# Altium PCB MONA-EDU.PCBDOC
Units mm, origin at the board's own origin, x right, y up, seen from the top; angles counter-clockwise.
Board outline 60.07 x 68.58 mm, 2 copper layers (Top Layer, Bottom Layer); 70 components, 0 nets, 249 pads, 66 vias.
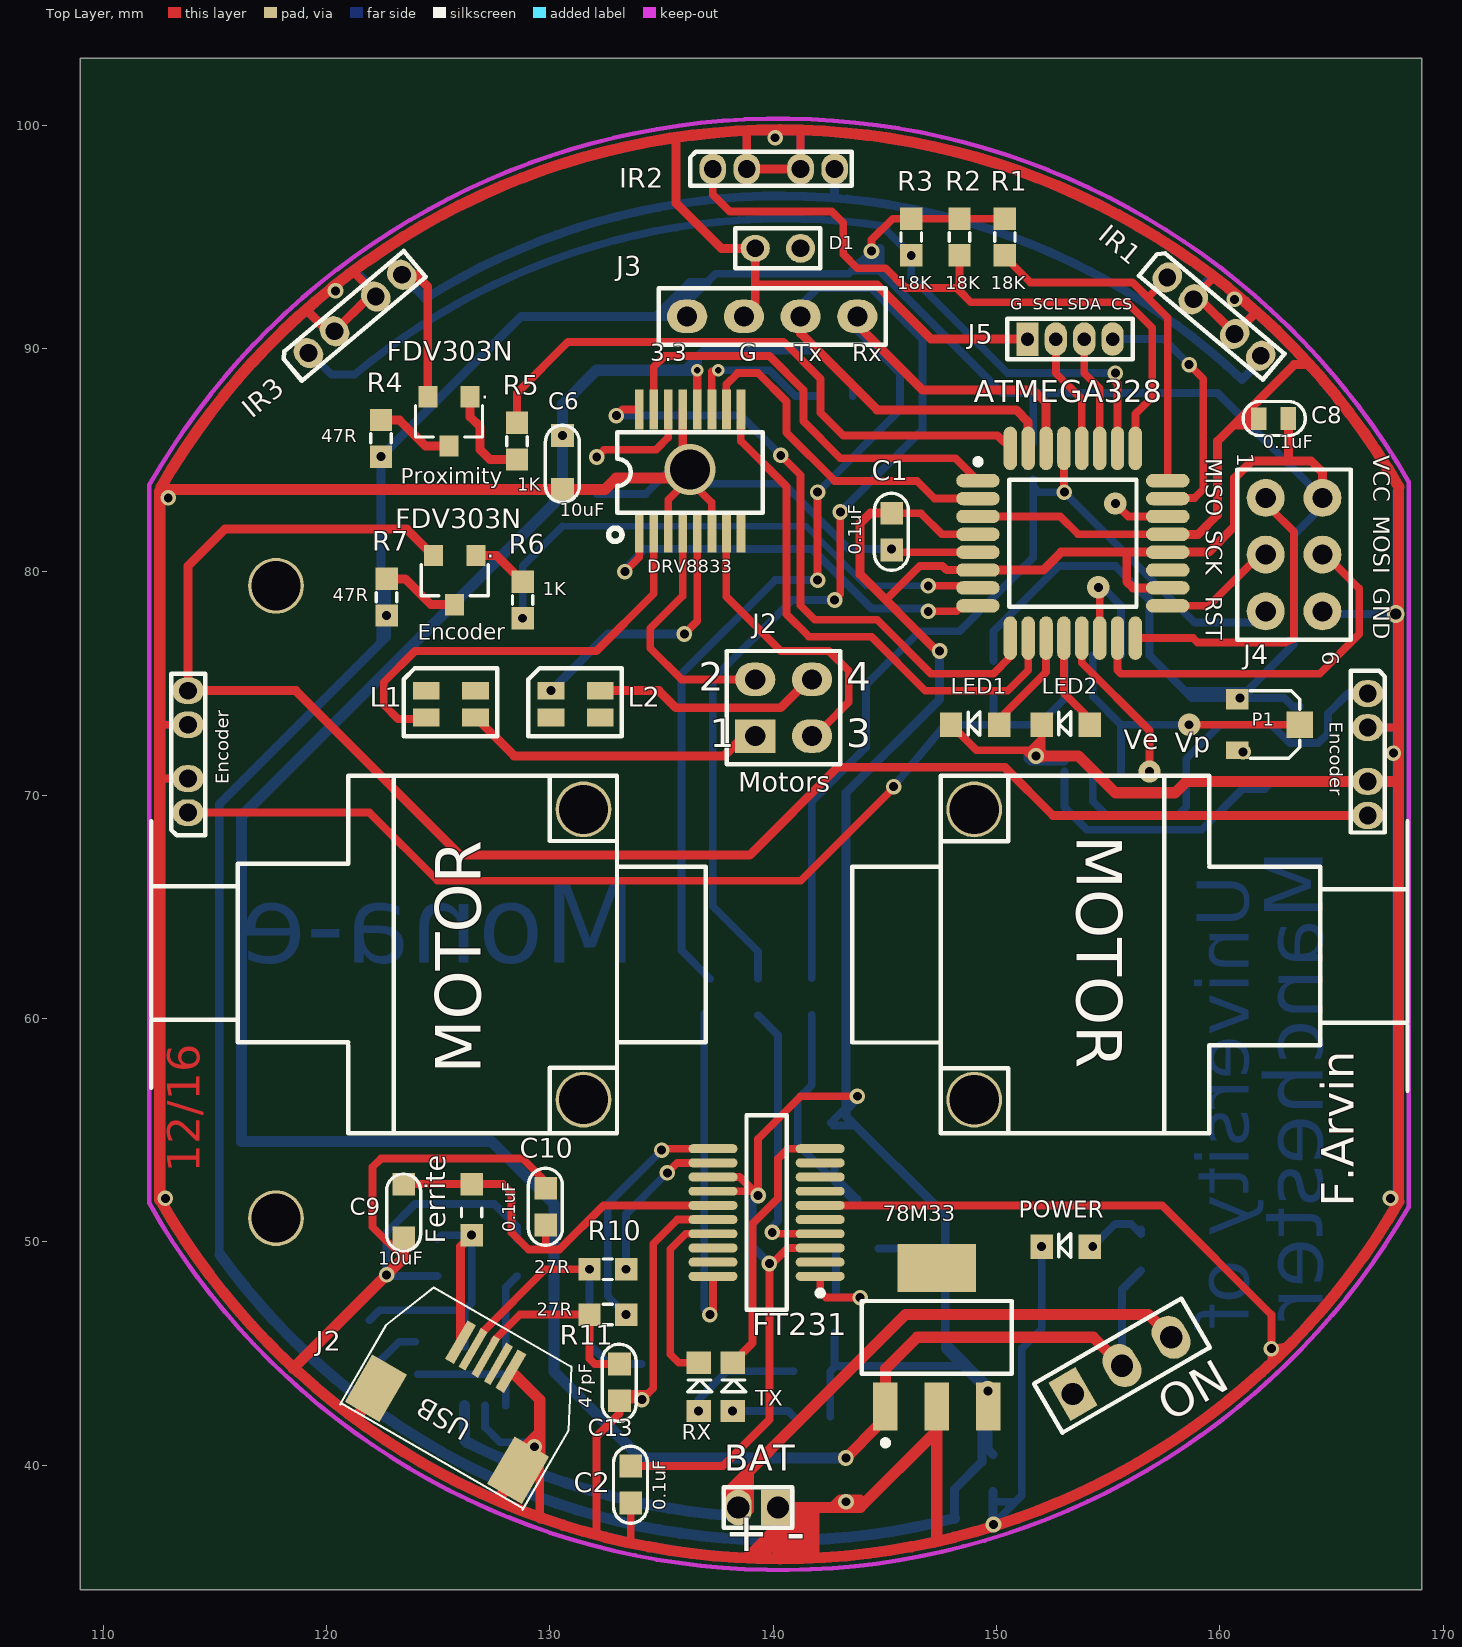
[diagram p0: Top Layer view]
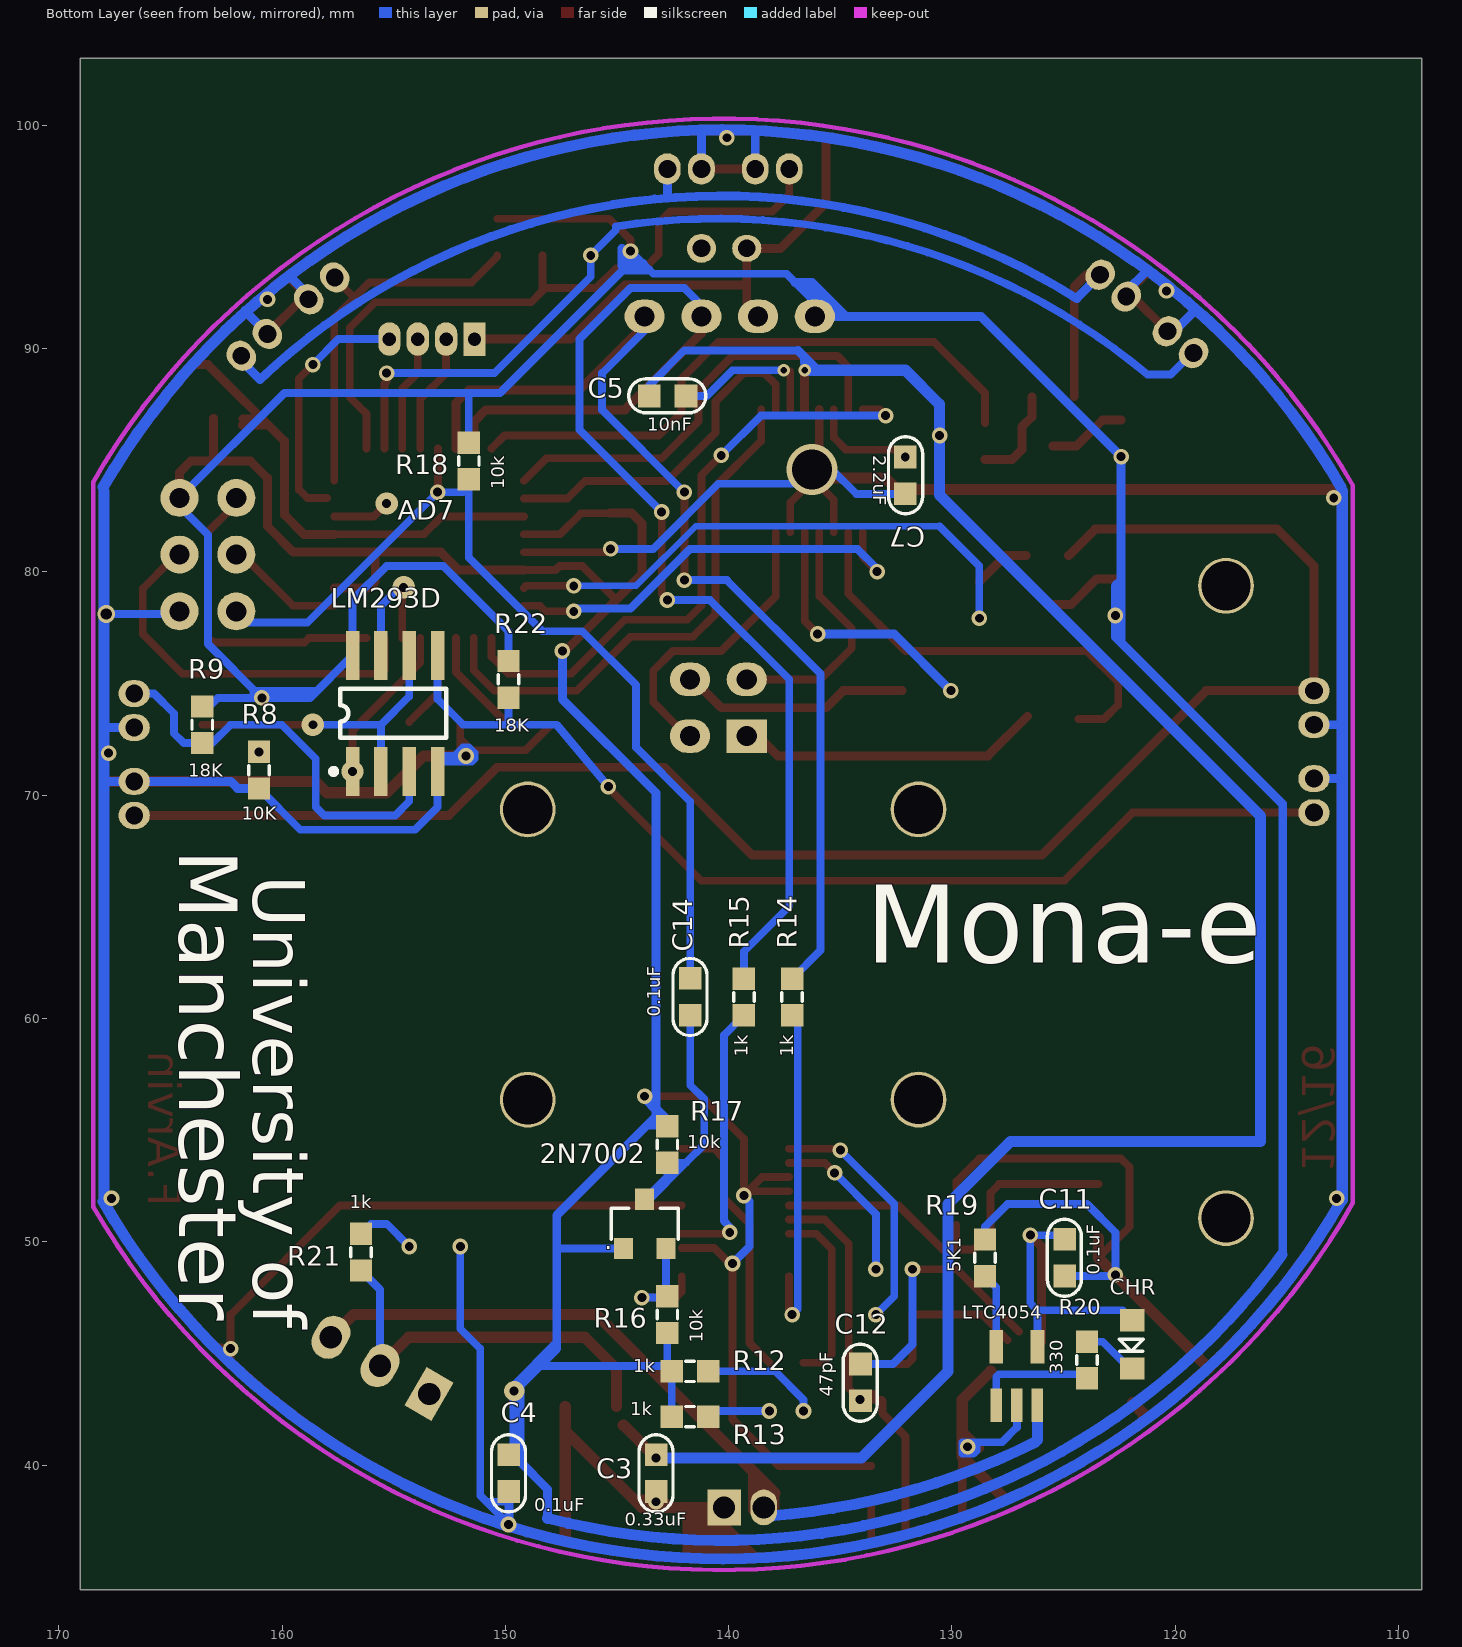
[diagram p1: Bottom Layer view, seen from below]

## Layer stack, top to bottom
Top Layer: signal copper 0.0356
Dielectric: dielectric 0.32, FR-4, Dk 4.8
Bottom Layer: signal copper 0.0356

## Board outline
108.966,102.997 169.037,102.997 169.037,34.417 108.966,34.417 108.966,102.997

## Design rules (kind name [scope] priority, off if disabled: settings)
Clearance [All] p1: gap=0.254
ComponentClearance [All] p1: gap=0.254 collisioncheckmode=3 verticalgap=0.254
PolygonConnect [All] p1: connectstyle=Relief reliefconductorwidth=0.254 reliefentries=4 polygonreliefangle="90 Angle"
RoutingVias [All] p1: holewidth=0.711 width=1.27 viastyle="Through Hole" minholewidth=0.711 minwidth=1.27 maxholewidth=0.711 maxwidth=1.27
SolderMaskExpansion [All] p1: expansion=0.102
TestPointUsage [All] p1: valid=0 allowmultiple=FALSE
Testpoint [All] p1: side=15 testpointundercomponent=TRUE minsize=1.016 maxsize=2.54 preferedsize=1.524 minholesize=0 maxholesize=1.016 preferedholesize=0.813 testpointgrid=0.025 style=1023 order=0123456789
Width [All] p1: maxlimit=0.254 minlimit=0.254 preferedwidth=0.254
18 further rules are at their usual default settings.

## Components (designator, comment, footprint, x,y, rotation, side; value= is the part's Value field where it differs from the comment)
2N7002 "FDV301N" SOT23#1 143.764,50.8 r180 bottom (schematic designator V48)
78M33 "Comment" SOT223 147.32,45.72 r0 top
ATMEGA328 "U1" 32A_M 153.416,81.28 r0 top locked
BAT "+ -" MHDR1X2#1 138.684,38.1 r0 top
C1 "0.1uF" 0603C#1 145.288,81.788 r90 top (schematic designator C14)
C2 "0.1uF" 0603C#1 133.604,39.116 r90 top (schematic designator C14)
C3 "0.33uF" 0603C#1 143.256,39.624 r90 bottom (schematic designator C14)
C4 "0.1uF" 0603C#1 149.86,39.624 r90 bottom (schematic designator C14)
C5 "10nF" 0603C#1 142.748,87.884 r180 bottom (schematic designator C14)
C6 "10uF" 0603C#2 130.556,84.836 r90 top (schematic designator C14)
C7 "2.2uF" 0603C#1 132.08,84.328 r270 bottom (schematic designator C14)
C8 "0.1uF" 0603C#3 162.56,86.868 r0 top (schematic designator C14)
C9 "10uF" 0603C#2 123.444,51.308 r90 top (schematic designator C14)
C10 "0.1uF" 0603C#1 129.794,51.562 r90 top (schematic designator C14)
C11 "0.1uF" 0603C#1 124.968,49.276 r90 bottom (schematic designator C14)
C12 "47pF" 0603C#1 134.112,43.688 r90 bottom (schematic designator C14)
C13 "47pF" 0603C#1 133.096,43.688 r90 top (schematic designator C14)
C14 "0.1uF" 0603C#1 141.732,60.96 r90 bottom
CHR "LED0" 0805L 121.92,46.736 r90 bottom (schematic designator D4)
D1 "Comment" MHDR1X2#2 139.7,94.488 r0 top
DRV8833 "Comment" SSOP16 136.271,84.455 r0 top
Encoder "Comment" "PCBComponent_1 - duplicate" 163.576,67.564 r270 top
Encoder "Comment" "PCBComponent_1 - duplicate" 116.84,76.2 r90 top
FDV303N "FDV301N" SOT23#1 125.73,79.629 r180 top (schematic designator V48)
FDV303N "FDV301N" SOT23#1 125.476,86.741 r180 top (schematic designator V48)
Ferrite "" R0603(1608)#1 126.492,51.308 r90 top (schematic designator R46)
FT231 "Comment" SOP63P600X162-20N 139.7,51.308 r180 top
IR1 "Comment" "PCBComponent_1 - duplicate" 161.036,86.36 r320 top
IR2 "Comment" "PCBComponent_1 - duplicate" 144.272,94.996 r0 top
IR3 "Comment" "PCBComponent_1 - duplicate" 126.492,91.948 r40 top
J2 "Comment" DIP30 123.952,37.592 r60 top locked
J3 "Comment" HDR1X4 136.144,91.44 r0 top
J4 "Comment" HDR2X3 162.052,83.312 r270 top locked
J5 "G  SCL SDA  CS" MHDR1X4 151.384,90.424 r0 top
L1 "Comment" LCC4 124.46,74.676 r0 top
L2 "Comment" LCC4 130.048,74.676 r0 top
LED1 "LED0" 0805L 150.368,73.152 r0 top (schematic designator D4)
LED2 "LED0" 0805L 154.432,73.152 r0 top (schematic designator D4)
LM293D "Comment" SOIC16 152.4,73.66 r180 bottom
LTC4054 "Comment" LT5054 128.016,42.672 r90 bottom
Motors "J2" HDR2X2 139.192,72.644 r0 top locked
ON "Comment" HDR1X3 153.416,43.18 r30 top
P1 "FDV301N" SOT23#2 162.052,73.152 r270 top (schematic designator V48)
POWER "LED0" 0805L 154.432,49.784 r0 top (schematic designator D4)
R1 "18K" R0603(1608)#2 150.368,94.996 r270 top (schematic designator R46)
R2 "18K" R0603(1608)#2 148.336,94.996 r270 top (schematic designator R46)
R3 "18K" R0603(1608)#2 146.177,94.996 r270 top (schematic designator R46)
R4 "47R" R0603(1608)#2 122.428,85.979 r270 top (schematic designator R46)
R5 "1K" R0603(1608)#2 128.524,85.852 r270 top (schematic designator R46)
R6 "1K" R0603(1608)#2 128.778,78.74 r270 top (schematic designator R46)
R7 "47R" R0603(1608)#2 122.682,78.867 r270 top (schematic designator R46)
R8 "10K" R0603(1608)#2 161.036,71.12 r90 bottom (schematic designator R46)
R9 "18K" R0603(1608)#2 163.576,73.152 r270 bottom (schematic designator R46)
R10 "27R" R0603(1608)#2 132.588,48.768 r0 top (schematic designator R46)
R11 "27R" R0603(1608)#2 132.588,46.736 r0 top (schematic designator R46)
R12 "1k" R0603(1608)#2 141.732,44.196 r180 bottom (schematic designator R46)
R13 "1k" R0603(1608)#2 141.732,42.164 r180 bottom (schematic designator R46)
R14 "1k" R0603(1608)#2 137.16,60.96 r90 bottom (schematic designator R46)
R15 "1k" R0603(1608)#2 139.319,60.96 r90 bottom (schematic designator R46)
R16 "10k" R0603(1608)#2 142.748,46.736 r90 bottom (schematic designator R46)
R17 "10k" R0603(1608)#2 142.748,54.356 r90 bottom (schematic designator R46)
R18 "10k" R0603(1608)#2 151.638,84.963 r90 bottom (schematic designator R46)
R19 "5K1" R0603(1608)#2 128.524,49.276 r90 bottom (schematic designator R46)
R20 "330" R0603(1608)#2 123.952,44.704 r90 bottom (schematic designator R46)
R21 "1k" R0603(1608)#2 156.464,49.53 r90 bottom (schematic designator R46)
R22 "18K" R0603(1608)#2 149.86,75.184 r270 bottom (schematic designator R46)
RX "LED0" 0805L 136.652,42.164 r270 top (schematic designator D4)
TX "LED0" 0805L 138.176,42.164 r270 top (schematic designator D4)
? "Comment" "PCBComponent_1 - duplicate1" 157.5,70.86 r180 top locked
? "Comment" "PCBComponent_1 - duplicate1" 123,54.864 r0 top locked

## Footprints (in the part's own frame and the unit in brackets; to place one, negate y for a bottom-side part, rotate by r counter-clockwise, add the part's x,y. Pads: shape width x height; smd on the part's side, far side on the other; paste and mask are expansions set on the pad)
32A_M [mm] "Thin QFP, 32-Leads, Body 7x7mm, Pitch 0.8mm, IPC Low Density"
  oval 1.95x0.6 smd: 1(-4.25,2.8) 2(-4.25,2) 3(-4.25,1.2) 4(-4.25,0.4) 5(-4.25,-0.4) 6(-4.25,-1.2) 7(-4.25,-2) 8(-4.25,-2.8) 17(4.25,-2.8) 18(4.25,-2) 19(4.25,-1.2) 20(4.25,-0.4) 21(4.25,0.4) 22(4.25,1.2) 23(4.25,2) 24(4.25,2.8)
  oval 0.6x1.95 smd: 9(-2.8,-4.25) 10(-2,-4.25) 11(-1.2,-4.25) 12(-0.4,-4.25) 13(0.4,-4.25) 14(1.2,-4.25) 15(2,-4.25) 16(2.8,-4.25) 25(2.8,4.25) 26(2,4.25) 27(1.2,4.25) 28(0.4,4.25) 29(-0.4,4.25) 30(-1.2,4.25) 31(-2,4.25) 32(-2.8,4.25)
  silkscreen extent -4.37,-2.85 2.85,3.77, body extent -3.5,-3.5 3.5,3.5, height 1.2
0603C#1 [mil]
  rect 40x40 smd: 1(-32,-0.5) 2(33,-0.5)
  silkscreen extent -68,-30 68,30
0603C#2 [mil]
  rect 40x40 smd: 1(-45,0) 2(50,0)
  silkscreen extent -68,-30 68,30
0603C#3 [mil]
  rect 27.56x40 smd: 1(-32,-0.5) 2(20,0)
  silkscreen extent -60,-30 50,30
0805L [mm]
  rect 1x1.1 smd: 1(-0.254,0) 2(-2.413,0)
  silkscreen extent -1.64,-0.48 -1.11,0.58
DIP30 [mm]
  rect 2.45x1.8 smd: 0(4.191,4.445) 0(4.191,-2.921)
  rect 2x0.35 smd: " "(7.874,0.235) " "(7.874,0.885) ""(7.874,1.535)
  rect 2x0.45 smd: GND(7.874,-0.415) VDD(7.874,2.185)
  silkscreen extent 2.76,-3.97 9.4,5.46
HDR1X3 [mm] "Connector; Header; 3 Position"
  rect 1.4x2 hole 1: 1(0,0)
  oval 1.5x2 hole 1: 2(2.54,0) 3(5.08,0)
  silkscreen extent -1.27,-1.27 6.35,1.27
HDR1X4 [mm] "Connector; Header; 4 Position"
  oval 1.8x1.5 hole 0.9: 1(0,0) 2(2.54,0) 3(5.08,0) 4(7.62,0)
  silkscreen extent -1.27,-1.27 8.89,1.27
HDR2X2 [mm] "Connector; Header; 2x2 Position"
  rect 1.8x1.5 hole 0.9: 1(0,0)
  oval 1.8x1.5 hole 0.9: 2(0,2.54) 3(2.54,0) 4(2.54,2.54)
  silkscreen extent -1.27,-1.27 3.81,3.81
HDR2X3 [mm] "Connector; Header; 3x2 Position"
  round 1.7 hole 0.9: 1(0,0) 2(0,2.54) 3(2.54,0) 4(2.54,2.54) 5(5.08,0) 6(5.08,2.54)
  silkscreen extent -1.27,-1.27 6.35,3.81
LCC4 [mm]
  rect 1.2x0.8 smd: 1(0,-1.2) 2(2.2,-1.2) 3(2.2,0) 4(0,0)
  silkscreen extent -1.02,-2.03 3.17,1.02
LT5054 [mm]
  rect 1.5x0.518 smd: BAT(0,-1.84) GND(0,-0.92) LED(0,0)
  rect 1.5x0.62 smd: PROG(2.62,0) VCC(2.62,-1.84)
MHDR1X2#1 [mm] "Connector; Header; 2 Position"
  oval 1.2x1.6 hole 1: 1(-0.254,0)
  rect 1.5x1.6 hole 1: 2(1.524,0)
  silkscreen extent -0.9,-0.9 2.17,0.9
MHDR1X2#2 [mm] "Connector; Header; 2 Position"
  oval 1.3x1.2 hole 0.8: 1(-0.508,0)
  round 1.3 hole 0.8: 2(1.524,0)
  silkscreen extent -1.4,-0.9 2.41,0.9
MHDR1X4 [mm] "Connector; Header; 4 Position"
  rect 1x1.5 hole 0.6: 1(0,0)
  oval 1x1.5 hole 0.6: 2(1.27,0) 3(2.54,0) 4(3.81,0)
  silkscreen extent -0.9,-0.9 4.71,0.9
"PCBComponent_1 - duplicate" [mm]
  oval 1.2x1.4 hole 0.8: D-A(-1.524,3.048) D-C(-3.048,3.048) T-C(-6.985,3.048) T-E(-5.461,3.048)
  silkscreen extent -8,2.29 -0.76,3.81
"PCBComponent_1 - duplicate1" [mm]
  round 2.5 hole 2.2: 0(8.5,14.5) 1(8.5,1.5)
  silkscreen extent -10.9,0 13.97,16
R0603(1608)#1 [mm] "Chip Resistor, Body 1.6x0.8mm, IPC Medium Density"
  rect 1x1 smd: 1(-1.016,0) 2(1.27,0)
  silkscreen extent -0.2,-0.46 0.2,0.46, body extent -0.85,-0.48 0.85,0.48, height 0.6
R0603(1608)#2 [mm] "Chip Resistor, Body 1.6x0.8mm, IPC Medium Density"
  rect 1x1 smd: 1(-0.82,0) 2(0.82,0)
  silkscreen extent -0.2,-0.46 0.2,0.46, body extent -0.85,-0.48 0.85,0.48, height 0.6
SOIC16 [mm] "Small Outline; 16 Leads; Body Width 3.9 mm; Pitch 1.27 mm"
  rect 0.6x2.2 smd: "1 OUT A"(-4.445,-2.6) "2 IN-A"(-3.175,-2.6) "3 IN+A"(-1.905,-2.6) "4 GND"(-0.635,-2.6) "5 IN+B"(-0.635,2.6) "6 IN-B"(-1.905,2.6) "7 OUT B"(-3.175,2.6) "8 VCC"(-4.445,2.6)
  silkscreen extent -5.42,-2.72 -0.25,1.1
SOP63P600X162-20N [mm] "SOP, 20-Leads, Body 8.7x3.9mm (max), Pitch 0.63mm, IPC Medium Density"
  oval 2.2x0.4 smd: 1(-2.4,2.857) 2(-2.4,2.222) 3(-2.4,1.587) 4(-2.4,0.952) 5(-2.4,0.317) 6(-2.4,-0.318) 7(-2.4,-0.953) 8(-2.4,-1.588) 9(-2.4,-2.223) 10(-2.4,-2.858) 11(2.4,-2.857) 12(2.4,-2.222) 13(2.4,-1.587) 14(2.4,-0.952) 15(2.4,-0.317) 16(2.4,0.318) 17(2.4,0.953) 18(2.4,1.588) 19(2.4,2.223) 20(2.4,2.858)
  silkscreen extent -2.53,-4.35 0.9,4.35, body extent -1.95,-4.33 1.95,4.33, height 1.62
SOT23#1 [mm] "SOT23, 3-Leads, Body 2.9x1.3mm, Pitch 0.95mm, Lead Span 2.5mm, IPC Medium Density"
  rect 0.85x0.95 smd: Drain(0,1.1) Gate(-0.95,-1.1) S(0.95,-1.1)
  silkscreen extent -1.5,-0.7 1.5,0.7, body extent -1.5,-0.7 1.5,0.7, height 1.1
SOT23#2 [mm] "SOT23, 3-Leads, Body 2.9x1.3mm, Pitch 0.95mm, Lead Span 2.5mm, IPC Medium Density"
  rect 0.9x1 smd: 1(-1.143,-1.27)
  rect 0.8x1 smd: 2(1.143,-1.27)
  rect 1.2x1.2 smd: 3(0,1.524)
  silkscreen extent -1.52,-0.7 1.5,1.52
SOT223 [mm] "SOT-223/SC-73; 4 Leads; Body 6.7 x 7.3 mm, inc. leads (LxW max)"
  rect 1.1x2.15 smd: 1(-2.3,-3.1) 2(0,-3.1) 3(2.3,-3.1)
  rect 3.5x2.15 smd: 4(0,3.1)
  silkscreen extent -3.35,-4.85 3.35,1.63
SSOP16 [mm] "SSOP; 16 Leads; Body Width 5.3 mm; Pitch 0.65 mm"
  rect 0.4x1.8 smd: 1(-2.275,-2.68) 2(-1.625,-2.68) 3(-0.975,-2.68) 4(-0.325,-2.68) 5(0.325,-2.68) 6(0.975,-2.68) 7(1.625,-2.68) 8(2.275,-2.68) 9(2.275,2.82) 10(1.625,2.82) 11(0.975,2.82) 12(0.325,2.82) 13(-0.325,2.82) 14(-0.975,2.82) 15(-1.625,2.82) 16(-2.275,2.82)
  silkscreen extent -3.65,-3.09 3.25,1.8

## Part data
2N7002 FDV303N FDV303N P1: "N-Channel MOSFET, 0.22A, 25V Vgs=2.7V Rds(on)=5"
C1 C2 C3 C4 C5 C6 C7 C8 C9 C10 C11 C12 C13 C14: library part CAP, "Capacitor"
CHR LED1 LED2 POWER RX TX: "Typical INFRARED GaAs LED"
Ferrite R1 R2 R3 R4 R5 R6 R7 R8 R9 R10 R11 R12 R13 R14 R15 R16 R17 R18 R19 R20 R21 R22: library part "R47 0603 5%", "Resistencia SMT Generica"

## Free pads (board coordinates)
  round 2.5 hole 2.2: 0(117.729,51.054) 0(117.729,79.375)

## Via types
v1: diameter 0.7, hole 0.4, Top Layer to Bottom Layer, 57 vias
v2: diameter 1, hole 0.4, Top Layer to Bottom Layer, 4 vias
v3: diameter 0.55, hole 0.3, Top Layer to Bottom Layer, 2 vias
v4: diameter 0.8, hole 0.5, Top Layer to Bottom Layer, 1 vias
v5: diameter 0.9, hole 0.4, Top Layer to Bottom Layer, 1 vias
v6: diameter 2.3, hole 1.8, Top Layer to Bottom Layer, 1 vias

## Nets (pads, with @x,y where several pads share a name; then routed paths per layer and width w, separated by ;. In a path a pad name is that pad's centre, name@x,y a point inside that pad or via, vN(x,y) a via of type N, cw(c..) or ccw(c..) an arc to the next point about the centre after c; other vN are vias at no path point)
pads on no net: 2N7002.Drain 2N7002.Gate 2N7002.S 78M33.1 78M33.2 78M33.3 78M33.4 "J2. " "LM293D.1 OUT A" "LM293D.2 IN-A" "LM293D.3 IN+A" "LM293D.4 GND" "LM293D.5 IN+B" "LM293D.6 IN-B" "LM293D.7 OUT B" "LM293D.8 VCC" ?.0 ?.1 ATMEGA328.1 ATMEGA328.2 ATMEGA328.3 ATMEGA328.4 ATMEGA328.5 ATMEGA328.6 ATMEGA328.7 ATMEGA328.8 ATMEGA328.9 ATMEGA328.10 ATMEGA328.11 ATMEGA328.12 ATMEGA328.13 ATMEGA328.14 ATMEGA328.15 ATMEGA328.16 ATMEGA328.17 ATMEGA328.18 ATMEGA328.19 ATMEGA328.20 ATMEGA328.21 ATMEGA328.22 ATMEGA328.23 ATMEGA328.24 ATMEGA328.25 ATMEGA328.26 ATMEGA328.27 ATMEGA328.28 ATMEGA328.29 ATMEGA328.30 ATMEGA328.31 ATMEGA328.32 BAT.1 BAT.2 C1.1 C1.2 C2.1 C2.2 C3.1 C3.2 C4.1 C4.2 C5.1 C5.2 C6.1 C6.2 C7.1 C7.2 C8.1 C8.2 C9.1 C9.2 C10.1 C10.2 C11.1 C11.2 C12.1 C12.2 C13.1 C13.2 C14.1 C14.2 CHR.1 CHR.2 D1.1 D1.2 DRV8833.1 DRV8833.2 DRV8833.3 DRV8833.4 DRV8833.5 DRV8833.6 DRV8833.7 DRV8833.8 DRV8833.9 DRV8833.10 DRV8833.11 DRV8833.12 DRV8833.13 DRV8833.14 DRV8833.15 DRV8833.16 Encoder.D-A Encoder.D-C Encoder.T-C Encoder.T-E FDV303N.Drain FDV303N.Gate FDV303N.S Ferrite.1 Ferrite.2 FT231.1 FT231.2 FT231.3 FT231.4 FT231.5 FT231.6 FT231.7 FT231.8 FT231.9 FT231.10 FT231.11 FT231.12 FT231.13 FT231.14 FT231.15 FT231.16 FT231.17 FT231.18 FT231.19 FT231.20 IR1.D-A IR1.D-C IR1.T-C IR1.T-E IR2.D-A IR2.D-C IR2.T-C IR2.T-E IR3.D-A IR3.D-C IR3.T-C IR3.T-E J2. J2.0 J2.GND J2.VDD J3.1 J3.2 J3.3 J3.4 J4.1 J4.2 J4.3 J4.4 J4.5 J4.6 J5.1 J5.2 J5.3 J5.4 L1.1 L1.2 L1.3 L1.4 L2.1 L2.2 L2.3 L2.4 LED1.1 LED1.2 LED2.1 LED2.2 LTC4054.BAT LTC4054.GND LTC4054.LED LTC4054.PROG LTC4054.VCC Motors.1 Motors.2 Motors.3 Motors.4 ON.1 ON.2 ON.3 P1.1 P1.2 P1.3 POWER.1 POWER.2 R1.1 R1.2 R2.1 R2.2 R3.1 R3.2 R4.1 R4.2 R5.1 R5.2 R6.1 R6.2 R7.1 R7.2 R8.1 R8.2 R9.1 R9.2 R10.1 R10.2 R11.1 R11.2 R12.1 R12.2 R13.1 R13.2 R14.1 R14.2 R15.1 R15.2 R16.1 R16.2 R17.1 R17.2 R18.1 R18.2 R19.1 R19.2 R20.1 R20.2 R21.1 R21.2 R22.1 R22.2 RX.1 RX.2 TX.1 TX.2
copper on no net: | length 2169.4
  Top Layer w0.35: 112.522,70.739 113.792,70.739 ; 112.522,73.152 113.792,73.152 ; 113.792,69.215 121.92,69.215 124.968,66.167 141.224,66.167 v1@145.415,70.358 ; 121.158,93.472 122.198,92.432 122.198,92.324 ; 123.444,49.276 122.047,50.673 122.047,53.34 122.428,53.721 128.778,53.721 129.807,52.692 129.807,52.4 ; 123.444,52.578 126.492,52.578 127.889,52.578 128.27,52.197 128.27,50.419 129.032,49.657 130.429,49.657 132.398,51.625 137.3,51.625 ; 124.333,73.406 123.19,73.406 122.555,74.041 122.555,75.057 123.952,76.454 132.08,76.454 134.646,79.02 134.646,81.775 ; 127,45.974 129.794,48.768 v1(131.768,48.768) ; 127.508,45.593 128.651,46.736 131.768,46.736 131.768,44.762 132.004,44.526 133.109,44.526 ; 128.524,86.672 128.524,88.011 130.81,90.297 140.462,90.297 142.113,88.646 142.113,87.122 143.129,86.106 150.04,86.106 150.616,85.53 ; 129.807,49.657 129.807,50.749 ; 132.08,36.957 132.08,41.275 133.109,42.304 133.109,42.875 133.159,42.926 v1(134.112,42.926) 134.62,43.434 134.62,49.911 135.7,50.99 137.3,50.99 ; v1(132.093,85.141) 132.423,85.471 134.747,85.471 135.296,86.02 135.296,87.275 ; v1(132.969,86.995) 133.249,87.275 133.996,87.275 ; v1(133.35,80.01) 133.996,80.656 133.996,81.775 ; 133.477,43.18 134.366,43.18 ; 133.617,36.462 133.617,38.303 ; 133.617,39.954 135.077,39.954 137.744,39.954 139.827,42.037 139.827,48.895 140.653,49.721 142.1,49.721 ; 134.646,87.275 134.646,89.18 135.128,89.662 139.827,89.662 141.351,88.138 141.351,86.741 143.002,85.09 148.156,85.09 149.166,84.08 ; v1@135.064,54.165 137.3,54.165 ; v1(135.255,53.086) 135.7,53.53 137.3,53.53 ; 135.296,81.775 135.296,83.226 v6@136.017,83.947 ; 135.946,81.775 135.946,78.923 134.493,77.47 134.493,77.343 134.493,76.581 135.89,75.184 138.684,75.184 139.192,75.692 ; v1(136.017,77.216) 136.596,77.795 136.596,81.775 ; v6@136.398,83.947 137.246,83.099 137.246,81.775 ; 136.652,44.577 135.763,44.577 135.382,44.958 135.382,49.657 136.081,50.355 137.3,50.355 ; v1(137.16,46.736) 137.3,46.876 137.3,48.45 ; 137.246,87.275 137.246,88.986 v3(137.541,89.027) ; 137.287,98.044 137.287,96.901 138.049,96.139 142.621,96.139 143.129,95.631 143.129,94.234 143.764,93.599 145.034,93.599 145.923,92.71 148.336,92.71 ; 137.3,52.895 138.493,52.895 v1(139.319,52.07) ; 137.896,81.775 137.896,78.893 140.335,76.454 142.494,76.454 143.383,75.565 143.383,74.168 142.367,73.152 141.732,73.152 ; 137.896,87.275 137.896,88.392 138.404,88.9 139.319,88.9 140.589,87.63 140.589,86.233 142.748,84.074 146.431,84.074 147.225,83.28 149.166,83.28 ; 138.176,44.577 139.065,45.466 139.065,50.8 140.208,51.943 140.208,53.721 140.653,54.165 142.1,54.165 ; 138.367,52.261 137.3,52.261 139.129,52.261 v1(139.319,52.07) ; 138.546,87.275 138.546,85.863 140.589,83.82 140.589,78.105 141.605,77.089 144.399,77.089 146.812,74.676 150.495,74.676 151.416,75.597 151.416,77.03 ; 139.573,35.941 139.954,36.322 139.954,36.703 139.192,35.941 138.811,35.941 140.208,37.338 140.208,38.1 ; v1(139.954,50.419) 140.017,50.355 142.1,50.355 ; 140.208,36.449 140.716,35.941 141.097,35.941 140.462,36.576 140.462,36.957 141.478,35.941 141.859,35.941 140.462,37.338 140.462,37.592 ; v1(140.335,85.217) 141.224,84.328 141.224,78.486 141.859,77.851 144.653,77.851 147.066,75.438 149.86,75.438 150.616,76.194 150.616,77.03 ; 141.224,98.044 141.224,99.822 ; v1(141.986,79.629) v1(141.986,83.566) ; 142.1,48.45 142.1,47.765 142.367,47.498 v1(143.891,47.498) ; 142.1,51.625 157.416,51.625 162.306,46.736 162.306,44.577 ; v1(142.748,78.74) 143.002,78.994 v1(143.002,82.677) ; v1(143.764,56.515) 141.224,56.515 139.319,54.61 v1(139.319,52.07) ; v1(144.399,94.361) 144.399,94.869 145.346,95.816 146.177,95.816 148.336,95.816 150.368,95.816 ; 145.034,78.74 146.558,80.264 147.574,80.264 147.758,80.08 149.166,80.08 ; 145.301,82.626 146.609,82.626 147.555,81.68 149.166,81.68 ; v1@145.396,80.88 149.166,80.88 ; 145.923,87.249 146.05,87.249 ; v1(146.939,78.232) 148.209,78.232 148.457,78.48 149.166,78.48 ; v1(146.939,79.375) 149.071,79.375 149.166,79.28 ; 147.955,73.152 149.098,72.009 151.511,72.009 152.019,72.517 ; 148.336,94.176 148.336,92.583 148.844,92.075 154.305,92.075 154.432,92.075 155.829,92.075 156.972,90.932 156.972,90.155 156.972,87.825 156.591,87.444 156.216,87.07 156.216,85.53 ; 149.166,82.48 152.851,82.48 153.651,81.68 157.666,81.68 ; 150.114,73.406 152.216,75.508 152.216,77.03 ; 150.368,94.176 150.368,94.107 151.511,92.964 156.083,92.964 157.666,91.381 157.666,84.08 ; 151.257,72.009 151.638,71.628 152.019,71.628 152.019,72.517 ; 152.019,73.152 152.019,72.517 ; 152.654,90.424 152.654,88.9 153.816,87.738 153.816,85.53 ; 153.016,77.03 153.016,74.568 154.305,73.279 ; v1@153.016,83.585 153.016,85.53 ; 153.816,77.03 153.816,75.927 156.845,72.898 v2(156.845,71.06) ; 153.924,90.424 153.924,88.9 154.616,88.208 154.616,85.53 ; v2(154.559,79.306) 154.616,79.249 154.616,77.03 ; v2(155.321,83.058) 155.899,82.48 157.666,82.48 ; v1(155.321,88.9) 155.321,88.519 155.416,88.424 155.416,85.53 ; 155.416,77.03 155.416,75.597 155.575,75.438 164.465,75.438 166.243,77.216 166.243,79.248 164.973,80.518 164.592,80.518 ; 156.216,77.03 158.809,77.03 159.004,76.835 162.941,76.835 163.322,76.993 163.322,81.788 162.306,82.804 162.306,83.312 ; 156.771,92.276 157.644,93.149 157.644,93.185 ; 157.666,78.48 159.506,78.48 161.417,80.391 ; 157.988,83.312 158.877,83.312 159.258,83.693 159.258,88.646 v1(158.623,89.281) ; v2(158.623,73.152) 163.576,73.152 ; 158.812,92.205 158.812,92.264 159.766,93.218 ; v1(162.306,45.212) 163.068,45.339 ; 166.624,70.612 168,70.612 ; 166.624,73.025 168,73.025
  Top Layer w0.4: 119.126,91.694 120.047,90.773 120.349,90.773 121.9,92.324 122.198,92.324 ; 122.428,86.799 123.259,86.799 124.417,85.641 125.476,85.641 ; 122.682,79.687 123.513,79.687 124.671,78.529 125.73,78.529 ; 123.365,93.303 123.994,93.303 124.526,92.771 124.526,89.662 ; 124.526,87.841 124.526,89.85 ; 124.78,80.729 123.594,81.915 115.443,81.915 113.792,80.264 113.792,74.676 118.618,74.676 125.984,67.31 138.938,67.31 142.875,71.247 150.368,71.247 152.527,69.088 164.465,69.088 166.624,69.088 ; 125.997,45.504 125.997,49.797 v1(126.492,50.292) ; 126.426,87.841 126.426,86.934 126.873,86.487 126.873,85.471 127.312,85.032 128.524,85.032 ; 126.619,73.533 128.397,71.755 137.795,71.755 139.192,73.152 ; 126.68,80.729 127.609,80.729 128.778,79.56 ; 128.778,40.767 129.54,41.529 ; 129.54,37.592 129.54,40.386 ; 132.248,74.676 134.874,74.676 135.636,73.914 140.335,73.914 141.732,75.311 141.732,75.692 ; 135.636,99.441 135.636,96.52 137.668,94.488 139.192,94.488 139.192,91.948 138.684,91.44 ; v6@135.946,85.273 135.946,87.275 ; 136.596,87.275 v3(136.596,89.027) ; 137.922,38.1 137.922,38.735 ; 138.736,38.025 138.736,39.549 ; 138.811,99.695 138.811,98.044 141.224,98.044 ; 138.938,37.973 138.938,39.751 ; 139.192,92.837 144.653,92.837 147.066,90.424 151.384,90.424 ; 140.843,38.1 140.843,36.576 140.882,36.537 140.882,36.029 141.224,36.371 141.224,38.1 141.605,38.1 141.607,38.098 141.607,36.193 141.859,35.941 141.859,37.973 141.986,38.1 ; 141.224,91.44 141.224,90.678 144.653,87.249 150.876,87.249 151.416,86.709 151.416,85.53 ; 142.621,38.1 143.002,38.481 143.891,38.481 ; v1@143.226,40.289 v1(143.249,40.313) ; 143.764,91.44 143.764,91.059 146.685,88.138 151.638,88.138 152.216,87.56 152.216,85.53 ; 145.301,82.626 144.348,82.626 143.891,82.169 143.891,79.883 147.32,76.454 v1(147.447,76.454) ; 149.166,80.08 152.089,80.08 152.889,80.88 157.666,80.88 159.493,80.88 160.655,82.042 160.655,84.201 161.417,84.963 164.084,84.963 164.592,84.455 164.592,83.312 ; 149.62,42.62 149.733,42.733 ; 155.829,80.88 155.829,79.566 156.115,79.28 157.666,79.28 ; 157.666,81.68 159.023,81.68 159.893,82.55 159.893,85.852 163.322,89.281 164.084,89.281 ; 158.812,92.205 159.109,92.205 160.66,90.654 161.544,91.538 ; 161.747,86.855 160.965,86.855 160.693,86.583 161.767,86.583 ; 163.068,84.963 163.068,86.868
  Top Layer w0.5: v1@112.522,51.87 112.522,83.611 112.604,83.693 130.81,83.693 ; v1@112.585,51.796 ccw(c140.297,67.796) 168.01,51.796 ; 112.585,83.796 cw(c140.297,67.796) 168.01,83.796 ; 118.491,44.323 123.444,49.276 123.444,50.165 ; 121.412,42.037 121.412,42.291 121.92,42.799 ; 127.762,38.608 129.54,40.386 129.54,42.926 128.262,44.204 128.248,44.204 ; 130.556,83.693 132.461,83.693 132.969,84.201 v6@135.636,84.201 ; 137.922,38.735 138.684,39.497 ; 138.43,38.1 138.43,39.243 141.224,42.037 145.923,46.736 151.638,46.736 156.799,46.736 157.815,45.72 ; 140.208,35.814 140.208,38.1 143.891,38.1 147.32,41.529 147.32,42.62 147.32,36.576 ; v1(143.249,40.313) 144.72,41.783 ; 145.02,42.62 145.02,44.309 146.431,45.72 154.346,45.72 155.616,44.45 ; v1(151.765,71.755) 153.67,71.755 155.321,70.104 157.988,70.104 158.496,70.612 168,70.612 ; 168,51.87 168,83.611
  Bottom Layer w0.3: 130.556,82.042 141.478,82.042 144.145,79.375 v1(146.939,79.375)
  Bottom Layer w0.35: 119.182,89.793 119.249,89.793 120.204,88.838 121.251,88.838 ; 121.251,88.838 cw(c140.487,65.817) 145.058,95.466 145.058,95.295 v1(146.177,94.176) 146.177,93.218 150.495,88.9 v1(155.321,88.9) ; 121.92,44.323 122.047,44.323 123.248,45.524 123.952,45.524 ; 121.92,46.482 122.366,46.928 126.176,46.928 ; v1@122.682,48.463 124.955,48.463 ; v1(122.682,48.514) 122.682,50.419 123.952,51.689 127.508,51.689 128.524,50.673 128.524,50.096 ; 124.079,44.069 127.889,44.069 128.016,43.942 128.016,42.672 ; 124.955,50.114 125.133,50.292 v1(126.492,50.292) 126.492,47.244 126.176,46.928 ; 126.176,41.118 126.276,41.018 ; 126.176,45.292 126.176,46.928 ; 127.096,42.672 127.096,41.687 127.762,41.021 129.095,41.021 v1(129.299,40.818) ; 128.016,45.292 128.016,47.948 128.524,48.456 ; v1(128.778,77.92) 128.778,80.264 130.556,82.042 ; v1(131.768,48.768) 131.768,45.397 132.639,44.526 134.099,44.526 ; 132.093,83.49 134.29,83.49 135.382,84.582 v6(136.271,84.582) ; v1(132.969,86.995) 138.557,86.995 v1(140.335,85.217) ; v1@133.35,80.137 134.239,81.026 141.732,81.026 144.399,78.359 146.812,78.359 v1(146.939,78.232) ; v1(133.408,46.736) 132.588,47.556 132.588,51.689 v1(135.001,54.102) ; v1(133.408,48.768) 133.408,51.239 v1(135.255,53.086) ; 136.144,91.44 136.144,92.075 137.033,92.964 137.414,93.345 143.383,93.345 v1(144.399,94.361) 144.399,93.853 145.542,92.71 150.241,88.011 159.893,88.011 164.592,83.312 164.592,82.931 163.322,81.661 163.322,76.766 v1(160.909,74.353) ; v6@136.271,83.947 140.462,83.947 143.383,81.026 v1(145.288,81.026) ; v3(136.596,89.027) 136.652,89.662 136.906,89.916 141.986,89.916 143.561,88.341 143.561,87.871 ; v1(136.652,42.418) 136.652,42.926 137.922,44.196 140.912,44.196 ; 136.906,60.198 136.906,46.99 v1(137.16,46.736) ; 137.16,61.78 135.89,63.05 135.89,75.438 140.081,79.629 v1(141.986,79.629) ; v3(137.541,89.027) 139.827,89.027 140.983,87.871 141.91,87.871 ; v1(138.176,42.418) 140.658,42.418 140.912,42.164 ; v1(139.319,52.07) 139.065,51.816 139.065,49.784 v1(139.827,49.022) ; 139.319,60.14 140.208,59.251 140.208,50.927 139.954,50.673 v1(139.954,50.419) ; 139.319,61.78 139.319,62.992 137.287,65.024 137.287,75.184 140.843,78.74 v1(142.748,78.74) ; 141.719,60.147 141.719,57.01 141.097,56.388 141.097,54.356 141.917,53.536 ; 141.719,61.798 141.719,69.71 144.145,72.136 144.145,74.93 146.558,77.343 148.336,77.343 151.638,80.645 151.638,84.143 ; 141.732,91.44 141.224,91.44 141.224,91.948 141.986,92.71 144.399,92.71 146.685,90.424 146.685,86.36 v1(143.002,82.677) ; v1(141.986,83.566) 145.669,87.249 145.669,88.9 143.764,90.805 143.764,91.44 ; 142.552,42.164 142.552,44.196 ; 142.574,55.325 142.687,55.212 ; 142.748,45.916 142.748,44.392 142.552,44.196 ; 142.814,49.7 142.814,47.622 142.748,47.556 142.806,47.498 v1(143.891,47.498) ; 143.256,56.007 142.687,55.438 142.687,55.212 ; 143.256,57.023 143.256,55.88 143.764,56.388 v1(143.764,56.515) ; 143.637,51.816 141.917,53.536 ; 143.67,55.212 142.687,55.212 ; 143.764,51.9 142.748,52.916 142.748,53.536 141.917,53.536 ; 144.714,49.7 147.658,49.7 147.701,49.657 ; v1(145.392,70.381) 147.701,73.152 151.892,73.152 153.035,74.295 153.035,76.26 ; 148.717,44.436 142.792,44.436 142.552,44.196 ; 149.86,73.152 149.86,74.364 ; 149.86,76.004 149.86,77.343 152.781,80.264 155.321,80.264 156.845,78.74 156.845,76.26 158.752,74.353 v1(160.909,74.353) ; 150.749,38.354 149.847,38.354 149.847,37.351 151.13,38.633 151.13,45.212 152.019,46.101 v1(152.019,49.784) ; 151.638,83.947 151.638,83.82 151.892,83.566 v1(153.035,83.566) 158.877,77.724 162.052,77.724 ; 151.638,85.783 151.638,88.011 ; v1(151.765,71.755) 152.908,71.755 ; 152.273,71.755 151.892,72.136 151.638,72.136 151.384,71.882 151.384,71.628 151.511,71.501 153.035,71.501 ; 153.035,71.06 153.035,69.469 154.051,68.453 159.189,68.453 161.036,70.3 ; v1(154.305,49.784) 155.321,50.8 156.014,50.8 156.464,50.35 156.464,50.546 ; 154.305,71.06 154.305,69.723 154.94,69.088 158.115,69.088 158.496,69.469 158.496,71.628 160.02,73.152 162.306,73.152 163.126,72.332 163.576,72.332 164.407,72.332 164.846,72.771 164.846,73.66 165.735,74.549 166.624,74.549 ; 154.305,76.26 154.305,74.422 155.575,73.152 ; v2(154.559,79.306) 154.755,79.306 155.575,78.486 155.575,76.26 ; 155.194,90.424 157.48,90.424 v1(158.623,89.281) ; 155.575,71.06 155.575,73.152 ; 155.616,44.45 155.616,47.862 156.464,48.71 ; 158.398,74.707 158.429,74.676 161.29,74.676 161.29,74.48 161.417,74.353 ; v2(158.623,73.152) 155.575,73.152 ; 163.576,73.972 163.264,73.972 162.883,74.353 v1(160.909,74.353) ; 164.465,78.105 v4(167.873,78.105) ; 128.905,40.64 128.905,41.021 129.54,41.021 129.54,40.513 129.032,40.513 128.905,40.64
  Bottom Layer w0.4: 112.522,70.612 112.649,70.739 113.792,70.739 ; 112.522,73.152 113.792,73.152 ; 115.189,49.403 115.189,69.596 122.682,77.089 ; 119.126,91.694 120.047,90.773 120.349,90.773 ; 121.285,93.472 122.198,92.559 122.198,92.324 ; 122.428,79.629 122.682,79.375 122.682,77.089 ; 123.365,93.303 123.365,93.297 124.337,92.325 ; 124.395,92.232 cw(c140.36,66.833) 160.992,88.612 ; v1(130.048,74.676) 132.588,77.216 v1(136.017,77.216) ; 136.017,89.027 136.906,89.916 ; 136.144,91.44 128.709,91.44 v1(122.428,85.159) 122.428,78.301 ; 136.525,92.837 136.652,92.964 ; 138.811,98.044 138.811,99.695 ; 141.224,98.044 141.224,99.822 ; 142.748,96.901 142.748,98.044 ; 143.562,93.524 144.707,93.524 ; 143.839,93.801 144.347,93.801 144.399,93.853 144.399,94.107 144.78,94.488 144.78,93.726 ; v1(147.447,76.454) 147.447,74.295 143.256,70.104 143.256,64.706 143.256,55.626 147.701,51.181 147.701,45.212 ; 147.701,45.466 v5@149.606,43.561 ; 147.955,45.212 147.701,45.212 ; 148.108,37.618 148.108,38.903 149.344,40.14 v5@149.344,43.569 ; v5@149.733,43.434 v5(149.606,43.307) ; v1@149.847,37.351 149.847,38.811 ; 149.847,40.462 149.606,40.703 v5(149.606,43.307) ; 158.812,92.205 158.812,92.391 159.639,93.218 ; 160.66,90.654 160.66,90.683 161.671,91.694 ; 161.036,70.3 161.994,70.3 162.306,70.612 166.624,70.612 167.979,70.612 ; 161.055,88.679 161.828,89.451 161.828,89.675 ; 166.624,73.025 167.979,73.025 ; 122.428,78.301 v1(122.682,78.047) 122.682,77.089 ; 122.428,78.301 122.428,76.962 122.555,76.962 122.682,77.089 ; 136.652,92.964 137.033,92.964 136.271,92.964 134.747,91.44 135.128,91.44 136.652,92.964 ; 147.701,45.212 v5(149.606,43.307)
  Bottom Layer w0.5: v1@112.522,51.87 112.522,83.611 ; v1@112.537,51.879 ccw(c140.297,67.796) 168.01,51.796 ; 112.585,83.796 cw(c140.297,67.796) 168.01,83.796 ; 115.216,49.422 ccw(c140.312,67.621) 148.108,37.618 ; 126.176,41.118 126.176,42.672 ; 126.276,41.018 ccw(c140.615,69.626) 138.176,37.719 ; v3(136.596,89.027) 132.08,89.027 130.556,87.503 v1(130.556,86.106) 130.556,83.439 116.187,69.07 116.187,54.483 127.381,54.483 130.175,51.689 130.175,46.228 130.175,44.196 134.058,40.313 v1(143.249,40.313) ; v1@167.979,51.87 167.979,83.611
  other v1: 149.86,37.338 143.256,38.354 112.776,51.943 167.64,51.943 167.767,71.882 161.036,71.94 112.903,83.312 160.655,92.202 120.396,92.583 140.081,99.441

## Keep-outs
Keep-Out Layer:
  lines w0.2: 112.051,51.713 112.051,83.871 cw(c140.297,67.796) 168.454,84.026 168.454,51.54 ; 112.056,51.713 ccw(c140.297,67.796) 168.44,51.54

## Other copper
Top Layer:
  text "12/16" at 114.808,53.086 h2.5 r90
  text "F.Arvin" at 166.497,51.562 h2.5 r90
Bottom Layer:
  text "Manchester" at 165.481,67.564 h4.5 r90
  text "University of" at 162.052,66.421 h4 r90
  text "Mona-e" at 133.858,61.341 h6

## Silkscreen, mask and mechanical layers (free items; w line width, h text height)
Top Overlay:
  text "3.3       G     Tx    Rx" at 134.493,89.154 h1.3
  text "Proximity" at 123.317,83.693 h1.2
  text "Encoder" at 124.079,76.708 h1.2
  text "Ve" at 155.702,71.755 h1.5
  text "Vp" at 157.988,71.628 h1.5
  text "F.Arvin" at 166.497,51.562 h2.5 r90
Bottom Overlay:
  text "AD7" at 154.813,82.042 h1.5
  text "Manchester" at 165.481,67.564 h4.5 r90
  text "University of" at 162.052,66.421 h4 r90
  text "Mona-e" at 133.858,61.341 h6

## Text inside footprints (layer, text, board x,y; h text height)
J2: Top Overlay "USB" at 126.538,41.818 h0.9 r150
J4: Top Overlay "MISO  SCK   RST" at 159.131,85.09 h1.27 r270; Top Overlay "1" at 160.528,85.344 h1.27 r270; Top Overlay "6" at 164.338,76.454 h1.27 r270; Top Overlay "VCC  MOSI  GND" at 166.624,85.217 h1.27 r270
Motors: Top Overlay "1" at 137.16,72.136 h1.27; Top Overlay "2" at 136.652,74.676 h1.27; Top Overlay "4" at 143.256,74.676 h1.27; Top Overlay "3" at 143.256,72.136 h1.27
?: Top Overlay "MOTOR" at 152.928,68.193 h3.5 r270
?: Top Overlay "MOTOR" at 127.572,57.531 h3.5 r90